# Altium PCB JacdacBrainRP2040 59.PcbDoc (part 2 of 2)
Units mm, origin at the board's own origin, x right, y up, seen from the top; angles counter-clockwise.
Board outline 24 x 39.85 mm, 2 copper layers (Top Layer, Bottom Layer), stack 1.525 mm thick; 58 components, 45 nets, 236 pads, 56 vias.
Unrouted connection lines stored in the file: 43.
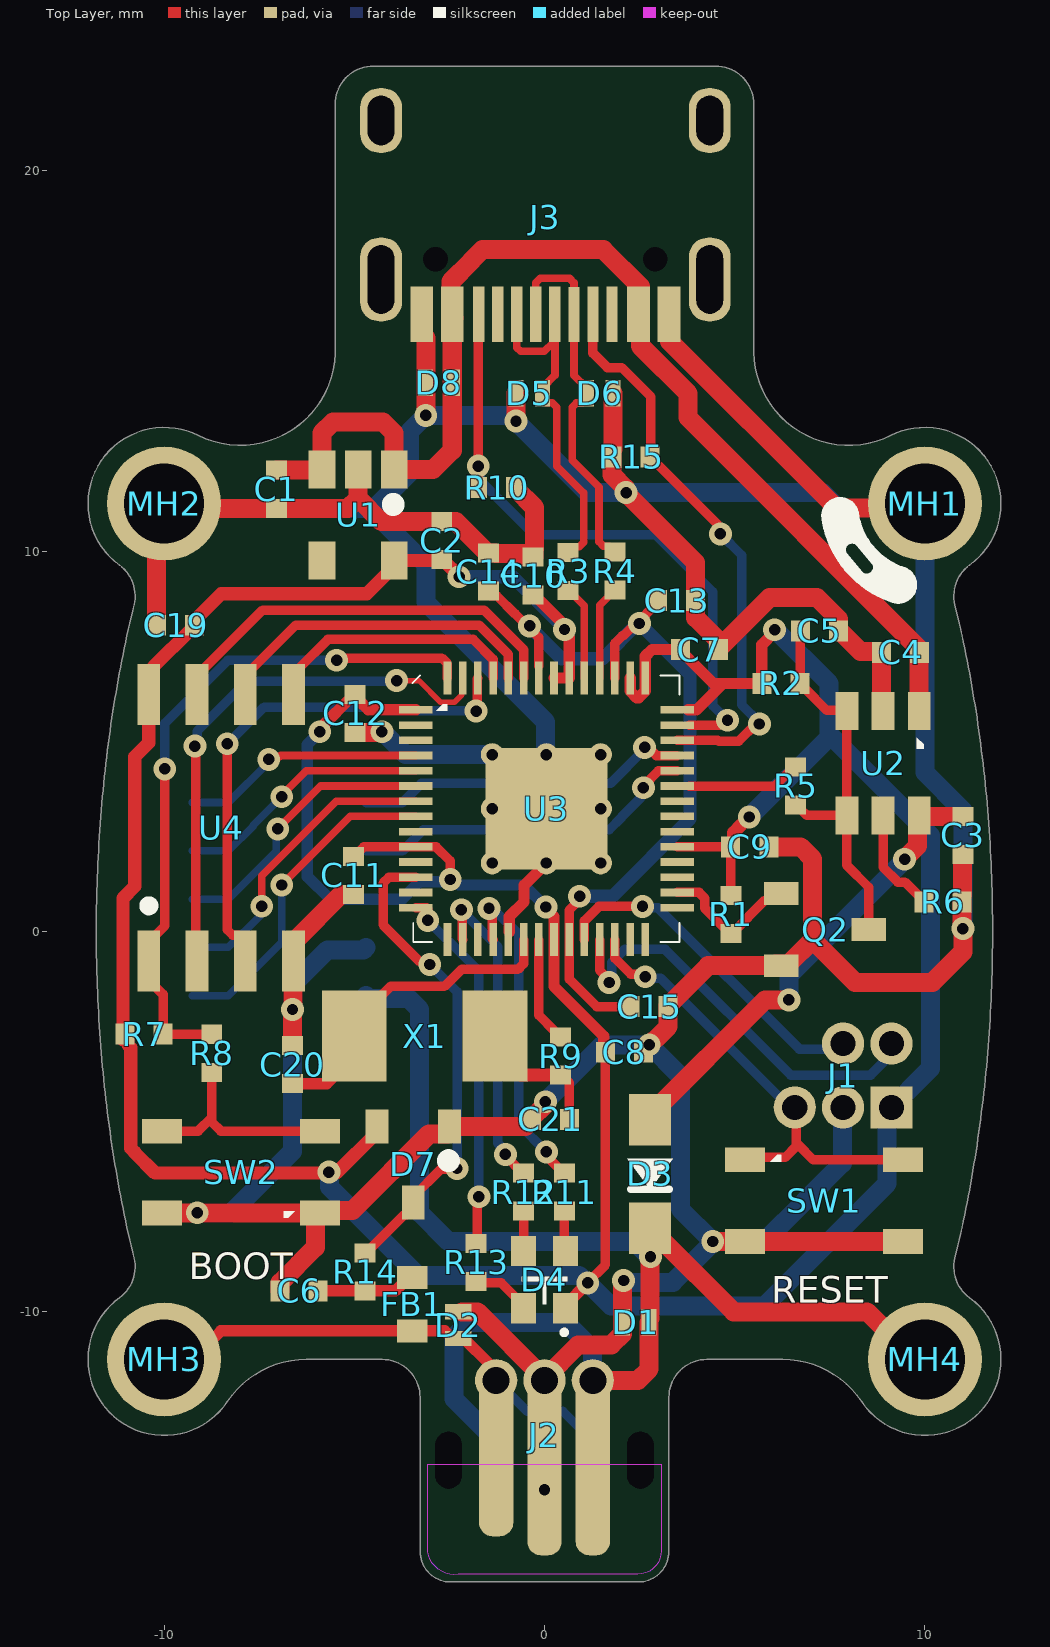
[diagram p0: Top Layer view]

## Part data (continued)
U4: library part W25Q32JVSSIQ, "FLASH - NOR Memory IC 32Mb (4M x 8) SPI - Quad I/O 133 MHz 8-SOIC", Case/Package=SOIC, Frequency=104MHz, Manufacturer=Winbond, Max Operating Temperature=85°C, Max Supply Voltage=3.6V, Min Operating Temperature=-40°C, Min Supply Voltage=2.7V, Operating Supply Voltage=3V, Supplier Part Number 1=W25Q32JVSSIQ-ND, Category=Flash, ComponentLink1Description="Online datasheet", ComponentLink1URL=http://www.winbond.com/resource-files/w25q32jv%20revg%2003272018%20plus.pdf, Density=32MB, Interface=SPI,Serial, Lead Free="Lead Free", Manufacturer Part Number=W25Q32JVSSIQ, Memory Type=FLASH,NOR, Mount="Surface Mount", Number of Pins=8, Packaging=Tray, Page Size=256B, Pricing 1="1=0.89000, 10=0.81400, 25=0.80400, 50=0.79920, 100=0.71460, 250=0.70852, 500=0.69806, 1000=0.67308, 5000=0.61306 (USD)", RoHS=Yes, RoHS Compliant=Yes, Stock 1=139235, Supplier 1=Digi-Key
X1: library part 7A12000053, "12MHz ±30ppm 12pF 50Ω SMD-5032_2P SMD Crystal Resonators RoHS", ESR (Equivalent Series Resistance)="50 Ohm", Frequency Tolerance=±30ppm, Load Capacitance=12pF, Manufacturer=TXC, Operating Temperature="-40°C ~ 85°C", Standard Package=1, Supplier Part Number 1=C90884, Category="Crystals and Oscillators", ComponentLink1Description="Online datasheet", ComponentLink1URL=https://datasheet.lcsc.com/lcsc/1809191817_TXC-Corp-7A12000053_C90884.pdf, Family=Crystals, Frequency=12MHz, Manufacturer Part Number=7A12000053, Mounting Type="Surface Mount", Supplier 1=LCSC

## Via types
v1: diameter 0.6, hole 0.3, Top Layer to Bottom Layer, tented both sides, 56 vias

## Nets (pads, with @x,y where several pads share a name; then routed paths per layer and width w, separated by ;. In a path a pad name is that pad's centre, name@x,y a point inside that pad or via, vN(x,y) a via of type N, cw(c..) or ccw(c..) an arc to the next point about the centre after c; other vN are vias at no path point)
1V1: C13.2 C14.2 C15.2 U3.23 U3.45 U3.50 | length 22.2
  Top Layer w0.25: C14.2@-1.475,8.875 -1.425,8.825 -1.254,8.825 -0.779,8.35 -0.77,8.35 -0.453,8.034 v1(-0.391,8.034) ; v1@-0.375,8.05 -0.375,7.955 -0.15,7.73 U3.50@-0.15,6.975 ; v1(0.922,0.928) 0.922,0.833 0.65,0.562 0.65,-0.886 0.654,-0.89 0.654,-1.255 1.374,-1.975 C15.2 ; U3.45 1.85,7.575 2.044,7.769 2.071,7.769 2.399,8.097 v1(2.494,8.097) 2.494,8.166 C13.2@2.867,8.539
  Bottom Layer w0.35: v1@-0.391,8.007 0.447,7.169 1.527,7.169 2.455,8.097 v1(2.494,8.097) 3.825,6.765 3.825,2.963 1.79,0.928 v1(0.922,0.928)
3V3: C2.2 C7.2 C8.2 C9.2 C10.2 C11.2 C12.2 C19.2 D4.1 D7.2 J1.1 J4.6 R1.1 R2.1 R7.1 U1.5 U3.1 U3.10 U3.22 U3.33 U3.42 U3.43 U3.44 U3.48 U3.49 U4.8 | length 113.8
  Top Layer w0.25: C11.2@-5.125,1.975 -5,1.975 -4.75,2.225 -4.428,2.225 U3.10 -2.85,2.225 -2.478,1.853 v1(-2.478,1.366) ; v1(1.138,-9.237) 1.138,-9.229 1.601,-8.765 C8.2@1.601,-3.151 ; U3.33 U3.33 C9.2 C9.2 4.896,0.954 R1.1 ; 5.149,2.777 v1(5.381,3.009)
  Top Layer w0.3: v1(-5.908,5.25) -5.908,5.33 -5.005,6.233 C12.2 ; C12.2@-4.855,6.052 -4.628,5.825 U3.1 ; C10.2@-0.275,8.85 0.468,8.107 0.468,7.996 v1(0.525,7.939) 0.525,7.858 0.65,7.733 U3.48 U3.49 ; 0.25,0.394 0.25,-1.446 1.554,-2.75 1.554,-3.129 C8.2 ; D4.1 0.55,-9.825 v1(1.138,-9.237) ; U3.44 2.25,6.322 2.426,6.146 2.474,6.146 2.65,6.322 U3.43 2.65,7.236 2.826,7.412 C7.2 3.575,7.387 4.444,6.518 4.69,6.518 ; U3.42@3.775,5.825 3.996,5.825 4.69,6.518 ; R2.1@5.711,6.518 4.69,6.518 ; R2.1@5.712,6.645 5.712,7.532 6.05,7.87 v1(6.05,7.933) ; R2.1@5.713,6.523 R2.1@5.713,6.644
  Top Layer w0.35: R7.1@-11.08,-2.852 R7.1@-11.08,-2.8 ; C19.2@-9.25,8.125 -8.5,8.875 -4.675,8.875 U1.5@-3.95,9.6 ; C19.2 -9.2,8.025 -9.275,7.95 -9.288,7.95 -10.28,6.958 -10.28,6.35 U4.8 -10.405,4.961 -10.773,4.594 -10.773,1.185 -11.08,0.879 R7.1@-11.08,-2.8 ; C11.2@-5.1,1.9 C11.2 ; D7.2 -4.4,-5.275 -5.475,-6.35 -10.239,-6.35 -10.775,-5.814 -10.775,-5.799 -10.875,-5.699 -10.875,-3.056 -10.95,-2.981 -10.95,-2.8 R7.1@-11.08,-2.8 ; U1.5 -2.725,9.75 C2.2 -2.675,9.775 -2.244,9.344 v1(-2.244,9.325) ; C9.2 4.971,2.298 4.971,2.599 5.149,2.777
  Bottom Layer w0.3: v1(-5.908,5.25) -5.908,5.242 -6.234,4.915 -6.234,1.443 -5.642,0.85 -3.737,0.85 -3.282,1.304 -2.62,1.304 v1@-2.559,1.366 ; v1@-2.253,1.222 -0.543,1.222 v1(0.037,0.642)
  Bottom Layer w0.35: v1(-2.244,9.325) -0.834,9.325 0.525,7.966 v1(0.525,7.939)
  Bottom Layer w0.5: v1(-5.669,-6.326) -5.649,-6.345 -5.649,-6.72 -3.33,-9.04 0.913,-9.04 1.11,-9.237 v1(1.138,-9.237) 1.75,-9.85 5.781,-9.85 9.005,-6.626 9.005,-4.74 10.142,-3.603 10.142,2.528 7.481,5.189 ; v1(5.381,3.009) 7.481,5.109 7.481,5.189 ; v1(6.05,7.933) 6.069,7.933 7.481,6.521 7.481,5.189
\I\L\I\M\_\E\N\A\B\L\E\: Q2.1 R1.2 U3.30 | length 3.8
  Top Layer w0.25: U3.30 4.062,1.025 4.209,0.879 4.209,0.616 4.875,-0.05 4.925,-0.05 5.8,0.825 6.025,0.825 Q2.1@6.212,1.012
\I\L\I\M\_\F\A\U\L\T\: R5.1 U3.37 | length 3
  Top Layer w0.25: U3.37@3.8,3.817 6.044,3.817 6.427,4.2 6.475,4.2 R5.1
CC1: J3.A5 R15.1 U3.40 | length 15.2
  Top Layer w0.25: J3.A5 1.275,15.203 1.654,14.824 2.03,14.824 2.798,14.055 2.798,12.498 R15.1 2.775,12.45 2.9,12.325 2.925,12.325 4.558,10.692 4.558,10.517 v1(4.625,10.45) ; U3.40 4.561,5.025 4.584,5.002 5.103,5.002 5.556,5.454 v1(5.651,5.454)
  Bottom Layer w0.25: v1(4.625,10.45) 5.187,9.888 5.187,5.955 5.651,5.491 v1(5.651,5.454)
CC2: J3.B5 R10.1 U3.41 | length 17.5
  Top Layer w0.25: R10.1@-1.768,11.669 -1.75,11.687 -1.75,12.226 v1(-1.742,12.234) ; R10.1 -1.742,11.683 v1(-1.742,12.234) ; J3.B5@-1.713,16.213 -1.742,16.184 v1(-1.742,12.234) ; U3.41@3.8,5.425 4.59,5.425 4.717,5.552 v1(4.812,5.552)
  Bottom Layer w0.25: v1(-1.742,12.234) -1.684,12.176 -1.684,11.838 -0.28,10.435 2.917,10.435 4.424,8.928 4.424,5.94 v1(4.812,5.552)
GND: C1.1 C2.1 C3.1 C4.1 C5.1 C6.1 C7.1 C8.1 C9.1 C10.1 C11.1 C12.1 C13.1 C14.1 C15.1 C19.1 C20.2 C21.2 D1.2 D2.2 D5.2 D6.2 D7.1 D8.2 J1.3 J2.2 J3.A1 J3.A12 J3.B1 J3.B12 J4.4 MH1.1 MH2.1 Q2.2 R6.1 R10.2 R15.2 SW1.3 SW1.4 SW2.1 SW2.2 U1.2 U2.2 U3.19 U3.57 U4.4 | length 164.1
  Top Layer w0.3: U3.19@-0.925,-0.014 -0.925,0.391 -0.538,0.778 -0.538,1.212 U3.57@0.05,1.8
  Top Layer w0.5: C19.1 -10.2,11.05 MH2.1 -9.875,11.125 C1.1 ; SW2.2 -10.048,-7.398 -9.131,-7.398 v1(-9.129,-7.396) -9.127,-7.398 -6.027,-7.398 -6.025,-7.4 -6.025,-8.305 -6.95,-9.23 C6.1 ; C1.1@-7.047,11.125 -6.879,11.125 -6.875,11.122 -5.166,11.122 -4.9,11.388 ; C20.2@-6.6,-3 C20.2 v1(-6.625,-2.05) -6.61,-2.035 -6.61,-0.685 U4.4@-6.6,-0.675 ; U4.4 -6.595,-0.275 -6.545,-0.225 -6.54,-0.225 -5.34,0.975 C11.1 ; SW2.1 -5.839,-7.339 -5.051,-7.339 -3.037,-5.325 -2.55,-5.325 -2.5,-5.275 D7.1 -0.506,-5.125 -0.344,-4.963 C21.2 -0.344,-4.913 0.004,-4.565 0.004,-4.497 v1(0.023,-4.478) ; C12.1 -4.292,5.233 v1(-4.275,5.25) ; U1.2 -4.9,11.388 ; v1(-3.121,13.566) J3.B1@-3.121,15.596 ; D2.2@-2.17,-10 -1.755,-10 J2.2@0,-11.755 ; C14.1 -1.5,9.95 -2.325,10.775 C2.1 -4.287,10.775 -4.9,11.388 ; C14.1@-1.461,9.95 -1.304,9.95 -1.29,9.936 -0.558,9.936 -0.471,9.85 -0.275,9.85 -0.275,10.046 -0.263,10.058 -0.263,11.145 -0.759,11.641 R10.2 ; U3.57@-1.358,1.783 U3.57@-1.356,1.781 ; v1(-0.75,13.418) D5.2 ; J2.2@0,-11.8 J2.2@0,-11.755 ; R15.2@1.775,12.45 1.775,12.005 2.127,11.653 2.127,11.556 v1@2.165,11.517 ; R15.2@1.775,12.5 1.775,12.646 1.8,12.671 D6.2 ; v1(2.08,-9.175) 2.08,-9.202 2.05,-9.232 2.05,-10.577 1.757,-10.87 0.885,-10.87 J2.2@0,-11.755 ; v1@2.165,11.504 3.975,9.694 3.975,8.246 C7.1@4.54,7.681 ; C8.1@2.6,-3.15 3.25,-2.5 C15.1 ; C15.1@3.25,-1.95 4.3,-0.9 6.025,-0.9 6.075,-0.85 6.425,-0.85 7.05,-0.225 ; J3.A1@3.292,15.51 7.52,11.282 7.525,11.282 7.698,11.109 7.725,11.109 v1(7.744,11.128) 9.878,11.128 MH1.1 ; v1(4.425,-8.15) SW1.3 SW1.4 SW1.4@9.625,-8.15 ; C7.1 4.575,7.437 5.915,8.778 7.167,8.778 7.725,8.219 C5.1 ; C9.1 6.732,2.223 7.05,1.905 7.05,-0.225 ; C5.1@7.735,7.935 8.306,7.363 8.86,7.363 8.86,5.84 U2.2 ; J1.3@8.125,-4.626 J1.3@8.125,-4.581 ; v1@10.975,0.095 R6.1 ; R6.1@10.984,0.956 C3.1@10.984,2.025 ; v1(11,0.076) 11,-0.541 10.199,-1.342 8.167,-1.342 7.05,-0.225
  Bottom Layer w0.5: MH2.1 -9.874,11.124 -4.476,11.124 ; v1(-9.129,-7.396) -8.238,-7.396 -6.625,-5.783 v1(-6.625,-2.05) -6.606,-2.031 -6.606,-1.384 -5.709,-0.487 -4.757,-0.487 J4.4 ; v1(-4.275,5.25) -4.248,5.25 -3.648,4.65 U3.57@-1.375,4.65 ; v1(-3.121,13.566) -3.551,13.135 -3.551,12.049 -4.476,11.124 ; v1@-3.094,13.566 -0.925,13.566 v1@-0.777,13.418 ; U3.57@-1.375,1.773 U3.57@-1.375,1.8 ; v1(-0.75,13.418) 1.131,11.537 v1(2.146,11.537) 2.149,11.54 7.305,11.54 7.717,11.128 v1(7.744,11.128) ; v1(0.023,-4.478) 1.523,-2.979 v1(2.752,-2.979) 3.573,-3.8 3.573,-7.298 v1(4.425,-8.15) ; U3.57@0.05,4.65 0.031,4.669 0.031,5.506 -3.121,8.657 -3.121,9.649 -4.476,11.004 -4.476,11.124 ; v1(2.08,-9.175) 2.107,-9.175 2.157,-9.225 3.377,-9.225 4.425,-8.177 v1(4.425,-8.15) ; J1.3@7.83,-4.645 7.83,-6.098 6.855,-7.073 6.855,-7.075 5.78,-8.15 v1(4.425,-8.15) ; MH1.1 10,4.181 11,3.181 v1(11,0.076)
  other v1: 0,-14.675
GPIO2: J4.9 U3.4 | length 6.4
  Top Layer w0.2: v1(-7.249,4.523) -7.172,4.599 -6.957,4.599 -6.932,4.625 U3.4
  Bottom Layer w0.2: J4.9 -8.309,3.39 -7.249,4.45 v1(-7.249,4.523)
GPIO3: J4.7 U3.5 | length 6.8
  Top Layer w0.2: v1(-6.907,3.543) -6.907,3.582 -6.264,4.225 U3.5
  Bottom Layer w0.2: J4.7 -8.309,2.12 -7.658,2.771 -7.658,2.793 v1(-6.907,3.543)
GPIO4: J4.5 U3.6 | length 7.4
  Top Layer w0.2: v1(-7.011,2.697) -5.883,3.825 U3.6
  Bottom Layer w0.2: J4.5 -8.309,0.85 -7.048,2.11 -7.048,2.66 v1(-7.011,2.697)
GPIO5: J4.3 U3.7 | length 8.1
  Top Layer w0.2: v1(-7.432,0.663) -7.432,1.467 -5.474,3.425 U3.7
  Bottom Layer w0.2: J4.3 -8.309,-0.42 -7.474,0.415 -7.474,0.622 v1(-7.432,0.663)
GPIO6: J4.1 U3.8 | length 8.7
  Top Layer w0.2: v1(-6.907,1.222) -6.907,1.228 -5.11,3.025 U3.8
  Bottom Layer w0.2: J4.1 -8.309,-1.69 -6.907,-0.289 v1(-6.907,1.222)
GPIO26: J4.8 U3.38 | length 9.2
  Top Layer w0.25: v1(2.6,3.778) 2.6,3.828 2.996,4.225 U3.38
  Bottom Layer w0.25: J4.8 -3.737,2.12 -3.183,2.674 1.685,2.674 1.686,2.675 1.703,2.675 2.025,2.997 2.025,3.014 2.533,3.521 2.533,3.711 v1(2.6,3.778)
GPIO27: J4.10 U3.39 | length 8.9
  Top Layer w0.25: v1(2.633,4.838) 2.727,4.838 2.94,4.625 U3.39
  Bottom Layer w0.25: J4.10 -3.737,3.39 -3.235,3.892 1.735,3.892 2.633,4.789 v1(2.633,4.838)
JD_DATA: D2.1 FB1.1 J2.1 MH3.1 | length 14
  Top Layer w0.3: MH3.1 -9.256,-11.25 -8.506,-10.5 -2.62,-10.5 -2.42,-10.7 D2.1 -2.12,-10.7 -1.435,-11.385 -1.435,-11.635 J2.1@-1.27,-11.8
  Bottom Layer w0.25: J2.1@-1.27,-11.8 -0.459,-12.611 0.481,-12.611 1.27,-13.4 J2.1@1.27,-14.425
JD_DATA_MCU: D7.3 R14.1 U3.12 | length 12.8
  Top Layer w0.25: R14.1 -4.69,-8.45 -3.69,-7.45 -3.625,-7.45 -3.45,-7.275 -3.45,-6.975 -2.73,-6.255 -2.323,-6.255 v1(-2.299,-6.232) ; U3.12 -4.09,1.425 -4.244,1.271 -4.244,0.171 -3.272,-0.801 -3.095,-0.801 v1@-3.028,-0.868
  Bottom Layer w0.25: v1(-3.015,-0.868) -2.299,-1.584 v1(-2.299,-6.232)
JD_PWR: D1.1 D3.1 J2.3 J4.2 MH4.1 | length 36.6
  Top Layer w0.5: J2.3@1.27,-11.8 2.457,-11.8 2.75,-11.507 D1.1 ; D1.1@2.775,-10.175 v1@2.775,-8.678 ; v1(2.787,-8.55) 2.781,-8.544 2.781,-7.806 D3.1 3.075,-8.1 4.975,-10 8.482,-10 9.732,-11.25 MH4.1
  Bottom Layer w0.5: J4.2 -4.621,-1.757 -3.575,-1.757 -3.282,-2.05 -3.282,-7.396 -2.528,-8.15 2.36,-8.15 2.76,-8.55 v1(2.787,-8.55) ; J2.3@-1.27,-14.675 -1.27,-13.4 -2.375,-12.295 -2.375,-10.65 -2,-10.275 0.557,-10.275 1.257,-10.975 1.257,-11.787 J2.3@1.27,-11.8
JD_RGB_B: R11.2 U3.18 | length 8.7
  Top Layer w0.25: v1(-1.458,0.608) -1.458,0.513 -1.375,0.43 -1.375,-0.187 U3.18 ; v1(0.049,-5.794) 0.116,-5.86 0.116,-5.966 0.5,-6.35 R11.2
  Bottom Layer w0.25: v1(-1.458,0.608) -1.363,0.608 -1.019,0.263 -1.005,0.263 -0.677,-0.065 -0.677,-5.068 v1(0.049,-5.794)
JD_RGB_G: R12.2 U3.16 | length 8.4
  Top Layer w0.25: v1(-2.183,0.57) -2.167,0.553 -2.167,-0.196 U3.16 ; v1(-1.029,-5.862) -1.029,-5.896 -0.575,-6.35 R12.2
  Bottom Layer w0.25: v1(-2.183,0.57) -2.183,0.555 -1.225,-0.403 -1.225,-5.57 -1.029,-5.767 v1(-1.029,-5.862)
JD_RGB_R: R13.2 U3.14 | length 9.7
  Top Layer w0.25: U3.14 -3.1,0.625 -3.075,0.6 -3.075,0.295 v1(-3.07,0.29) ; R13.2 -1.762,-8.162 -1.762,-7.012 v1(-1.725,-6.974)
  Bottom Layer w0.25: v1(-3.07,0.29) -2.549,-0.232 -2.54,-0.232 -1.725,-1.047 v1(-1.725,-6.974)
MCU_QSPI_SCLK: U3.52 U4.6 | length 8.9
  Top Layer w0.25: U4.6 -7.865,6.725 -6.537,8.053 -1.719,8.053 -0.95,7.284 U3.52
MCU_QSPI_SD0: U3.53 U4.5 | length 6.9
  Top Layer w0.25: U4.5 -6.42,6.4 -6.42,6.95 -5.692,7.678 -1.874,7.678 -1.35,7.154 U3.53
MCU_QSPI_SD1: U3.55 U4.2 | length 14.4
  Top Layer w0.15: v1(-3.889,6.594) -3.302,6.594 -2.733,6.025 -2.367,6.025 -2.175,6.217 -2.175,6.638 U3.55
  Top Layer w0.25: v1(-9.192,4.873) -9.163,4.845 -9.163,-0.747 U4.2
  Bottom Layer w0.25: v1(-9.192,4.873) -9.129,4.936 -9.129,5.265 -7.816,6.578 -3.905,6.578 v1(-3.889,6.594)
MCU_QSPI_SD2: U3.54 U4.3 | length 13.9
  Top Layer w0.25: v1@-8.34,4.93 -8.34,0.046 -8.194,-0.1 -8.04,-0.1 -7.865,-0.275 U4.3 ; v1(-1.796,5.792) -1.773,5.815 -1.773,6.639 U3.54
  Bottom Layer w0.25: v1(-8.34,4.933) -8.336,4.933 -7.37,5.9 -4.684,5.9 -4.584,5.8 -1.805,5.8 v1(-1.796,5.792)
MCU_QSPI_SD3: U3.51 U4.7 | length 11
  Top Layer w0.25: U4.7 -9.135,6.725 -7.41,8.45 -1.586,8.45 -0.548,7.412 -0.548,6.665 U3.51
MCU_QSPI_SS: R7.2 R8.1 U3.56 U4.1 | length 18.4
  Top Layer w0.25: R7.2 R8.1 ; R7.2 -10.025,-1.655 -10.405,-1.275 -10.405,-0.275 -9.983,0.147 v1(-9.983,4.274) ; v1(-5.464,7.128) -5.404,7.187 -2.696,7.187 -2.55,7.041 U3.56
  Bottom Layer w0.25: v1(-9.983,4.274) -9.983,5.469 -8.325,7.128 v1(-5.464,7.128)
MCU_SWCLK: J1.4 U3.24 | length 9.1
  Top Layer w0.25: U3.24 1.05,0.279 1.431,0.66 v1(2.575,0.66)
  Bottom Layer w0.25: v1(2.575,0.66) 2.618,0.617 2.987,0.617 6.699,-3.094 7.704,-3.094 J1.4
MCU_SWDIO: J1.2 U3.25 | length 11.3
  Top Layer w0.25: U3.25 1.452,-0.214 1.452,-1.025 1.7,-1.273 v1(1.7,-1.342)
  Bottom Layer w0.25: v1(1.7,-1.342) 1.767,-1.275 1.767,-0.81 2.105,-0.472 3.172,-0.472 6.475,-3.775 8.575,-3.775 J1.2@9.395,-2.955
MCU_USB_D_N: R4.1 U3.46 | length 2.5
  Top Layer w0.2: U3.46 1.45,8.575 1.675,8.8 1.675,8.825 1.825,8.975 R4.1
MCU_USB_D_P: R3.1 U3.47 | length 2.5
  Top Layer w0.2: R3.1 0.643,8.968 1.05,8.561 U3.47
NetC3_2: C3.2 D3.2 U2.6 | length 12.4
  Top Layer w0.5: D3.2 2.775,-4.825 5.802,-1.798 v1(6.425,-1.798) ; v1(9.467,1.9) 9.467,1.909 9.8,2.242 9.8,3 U2.6 ; U2.6@9.875,3.025 C3.2
  Bottom Layer w0.5: v1(6.425,-1.798) 6.425,-1.16 9.467,1.882 v1(9.467,1.9)
NetC5_2: C5.2 Q2.3 R2.2 R5.2 U2.3 U2.4 | length 10.4
  Top Layer w0.25: R5.2 6.625,3.325 6.75,3.2 6.75,3.196 6.896,3.05 U2.4 ; C5.2 6.719,7.894 6.719,6.501 6.712,6.495 6.837,6.37 6.862,6.37 7.421,5.811 7.939,5.811 U2.3 U2.4 ; Q2.3 8.525,1.162 7.95,1.737 U2.4
NetC6_2: C6.2 FB1.2 R14.2 | length 2.6
  Top Layer w0.3: C6.2 R14.2 -3.925,-9.45 -3.575,-9.1 FB1.2
NetC21_1: C21.1 R9.1 X1.1 | length 3.6
  Top Layer w0.25: R9.1 0.45,-3.775 0.656,-3.981 C21.1
  Top Layer w0.35: X1.1 -1.3,-3.1 -0.625,-3.775 R9.1
NetD4_2: D4.2 R13.1 | length 1.6
  Top Layer w0.25: R13.1 -1.762,-9.238 -1.137,-9.238 -0.55,-9.825 D4.2
NetD4_3: D4.3 R12.1 | length 0.7
  Top Layer w0.25: D4.3@-0.55,-8.325 -0.55,-7.625
NetD4_4: D4.4 R11.1 | length 0.7
  Top Layer w0.25: R11.1@0.5,-7.325 R11.1 ; D4.4@0.525,-8.325 0.525,-7.625
NetR6_2: R6.2 U2.5 | length 2.8
  Top Layer w0.25: U2.5 8.9,1.689 9.29,1.299 9.476,1.299 9.975,0.8 R6.2
NetR8_2: R8.2 SW2.3 SW2.4 | length 5.7
  Top Layer w0.25: SW2.4@-10.175,-5.25 -9.106,-5.25 -8.747,-4.891 ; R8.2@-8.722,-3.702 R8.2 -8.747,-4.891 ; SW2.3@-6.025,-5.25 -8.506,-5.25 -8.747,-5.009 -8.747,-4.891
RESET: J1.5 SW1.1 SW1.2 U3.26 | length 12.3
  Top Layer w0.25: U3.26 1.85,-0.704 2.271,-1.124 2.583,-1.124 v1(2.65,-1.191) ; SW1.1@5.575,-6 5.637,-5.938 6.329,-5.938 6.623,-5.643 6.623,-4.668 J1.5 ; 6.664,-5.602 7.062,-6 SW1.2
  Bottom Layer w0.25: v1(2.65,-1.191) 2.695,-1.236 3.06,-1.236 6.285,-4.462 6.69,-4.462 J1.5@6.855,-4.626
USB_D_N: D6.1 J3.A7 J3.B7 R4.2 | length 9.9
  Top Layer w0.2: J3.A7 -0.225,17.058 -0.108,17.175 0.658,17.175 0.775,17.058 J3.B7 0.775,14.625 1.1,14.3 D6.1 1.1,14 1,13.9 0.842,13.9 0.725,13.783 0.725,13.617 0.725,12.383 1.434,11.674 1.434,10.242 1.551,10.125 1.7,10.125 R4.2
USB_D_P: D5.1 J3.A6 J3.B6 R3.2 | length 9.9
  Top Layer w0.2: J3.B6 -0.725,15.35 -0.625,15.25 -0.007,15.25 0.225,15.482 0.225,16.175 J3.A6 0.275,14.625 -0.05,14.3 D5.1 -0.05,14 0.05,13.9 0.208,13.9 0.325,13.783 0.325,13.451 0.325,12.234 1.034,11.525 1.034,10.235 0.917,10.118 0.768,10.118 R3.2
VUSB: C1.2 C4.2 D8.1 J3.A4 J3.A9 J3.B4 J3.B9 U1.1 U1.3 U2.1 | length 30.4
  Top Layer w0.5: C1.2 U1.3@-5.875,12.125 ; U1.3 -5.85,13.105 -5.557,13.398 -4.249,13.398 -3.95,13.099 U1.1 -2.925,12.15 -2.425,12.65 D8.1 -2.425,16.715 -2.458,16.748 -2.458,17.087 -1.925,17.62 -1.925,17.632 -1.632,17.925 1.549,17.925 2.525,16.949 J3.A4@2.525,16.7 ; J3.B4@-2.416,16.084 J3.B4@-2.375,16.125 ; J3.A4@2.525,15.75 2.525,15.392 3.775,14.142 3.775,13.507 9.86,7.423 C4.2 ; U2.1 9.85,7.304 C4.2@9.86,7.313
XIN: C20.1 U3.20 X1.2 | length 8.6
  Top Layer w0.25: X1.2@-4.875,-2.75 -4.875,-2.275 -4.046,-1.446 -2.63,-1.446 -2.18,-0.996 -0.696,-0.996 -0.55,-0.85 U3.20
  Top Layer w0.3: C20.1 -5.725,-4 -4.825,-3.1 X1.2@-4.825,-2.75
XOUT: R9.2 U3.21 | length 2.8
  Top Layer w0.25: U3.21 -0.15,-2.2 0.275,-2.625 0.275,-2.65 0.4,-2.775 R9.2
pads on no net: J2. J3.1 J3.2 J3.3 J3.4 J3.A8 J3.B8 U1.4 U3.2 U3.3 U3.9 U3.11 U3.13 U3.15 U3.17 U3.27 U3.28 U3.29 U3.31 U3.32 U3.34 U3.35 U3.36

## Silkscreen, mask and mechanical layers (free items; w line width, h text height)
Top Overlay:
  region: 187 vertices and 1 holes, not listed, extent 7.28,8.619 9.792,11.417
  text "BOOT" at -9.355,-9.137 h0.7
  text "RESET" at 5.966,-9.765 h0.7
Bottom Overlay:
  drawing of 6 lines, arcs and shapes, not listed
  text "IO2" at -10.575,3.05 h0.4
  text "IO27" at -2.125,3.025 h0.4
  text "IO3" at -10.575,1.775 h0.4
  text "IO26" at -2.125,1.775 h0.4
  text "3V3" at -2.225,0.525 h0.4
  text "IO4" at -10.575,0.5 h0.4
  text "GND" at -2.125,-0.725 h0.4
  text "IO5" at -10.575,-0.775 h0.4
  text "JD_PWR" at -1.075,-2 h0.4
  text "IO6" at -10.55,-2.025 h0.4
  text "JacdacBrainRP2040" at 6.325,-9.425 h1
  text "'.ProjectCodenameID'-'.ProjectRevision'" at 3.95,-10.825 h1
Dimension:
  drawing of 232 lines, arcs and shapes, not listed
Board Outline:
  drawing of 232 lines, arcs and shapes, not listed
Top Assy:
  drawing of 234 lines, arcs and shapes, not listed
Bottom Assy:
  drawing of 232 lines, arcs and shapes, not listed

## Dimensions
-10,11.25 to -4.5,22.75 on Dimension
-10,-11.25 to -2.471,-17.1 on Dimension
-11.781,0 to 11.781,0 on Dimension
-4.5,22.75 to -2.471,-17.1 on Dimension
-10,-11.25 to -10,11.25 on Dimension
-3.27,-16.301 to 3.27,-16.301 on Dimension
-10,-11.25 to 10,-11.25 on Dimension

## Text inside footprints (layer, text, board x,y; h text height)
J2: Alignment "board outline  / for 'outie'" at -3.886,-14.4 h1.2 r180; Alignment "board outline  / for 'innie'" at -2.686,-9.425 h1.2 r180; Mechanical 9 "Jacdac / cable connector  / body" at 4.821,-21.258 h1.7 r180
MH1: Assembly Notes "5mm dia keepout  / for traces and  / components to  / allow space for  / bushes/standoffs/ / nuts/screw heads" at 13.025,-2.975 h0.5; Assembly Notes "board outline can  / be on 2.0mm   / radius if necessary" at 12.699,-7.27 h0.5
MH2: Assembly Notes "board outline can  / be on 2.0mm   / radius if necessary" at -12.794,14.806 h0.5 r180; Assembly Notes "5mm dia keepout  / for traces and  / components to  / allow space for  / bushes/standoffs/ / nuts/screw heads" at -12.794,10.361 h0.5 r180
R7: Top Assy "DNF" at -11.377,-3.05 h0.7